# Altium PCB PCB1.PcbDoc
Units mm, origin at the board's own origin, x right, y up, seen from the top; angles counter-clockwise.
Board outline 58 x 80 mm, 2 copper layers (Top Layer, Bottom Layer); 39 components, 48 nets, 181 pads, 24 vias.
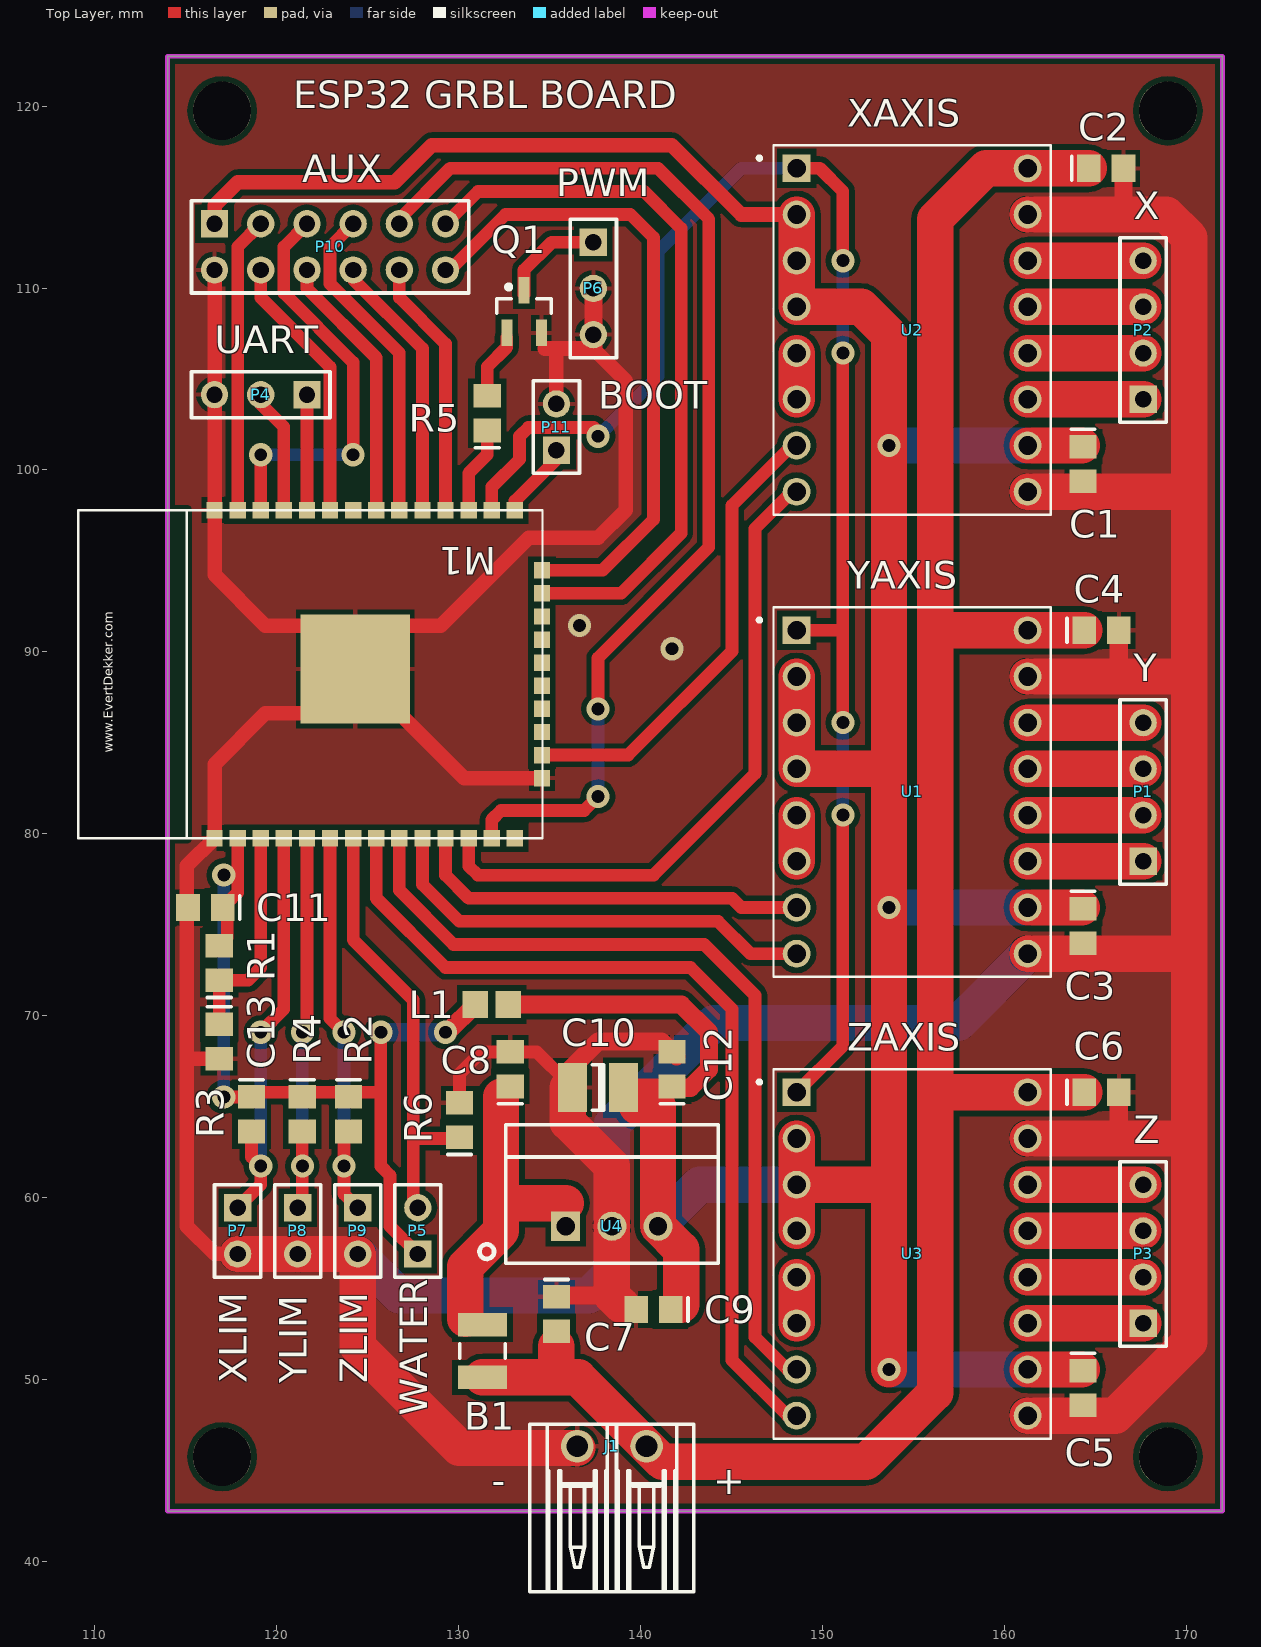
[diagram p0: Top Layer view]
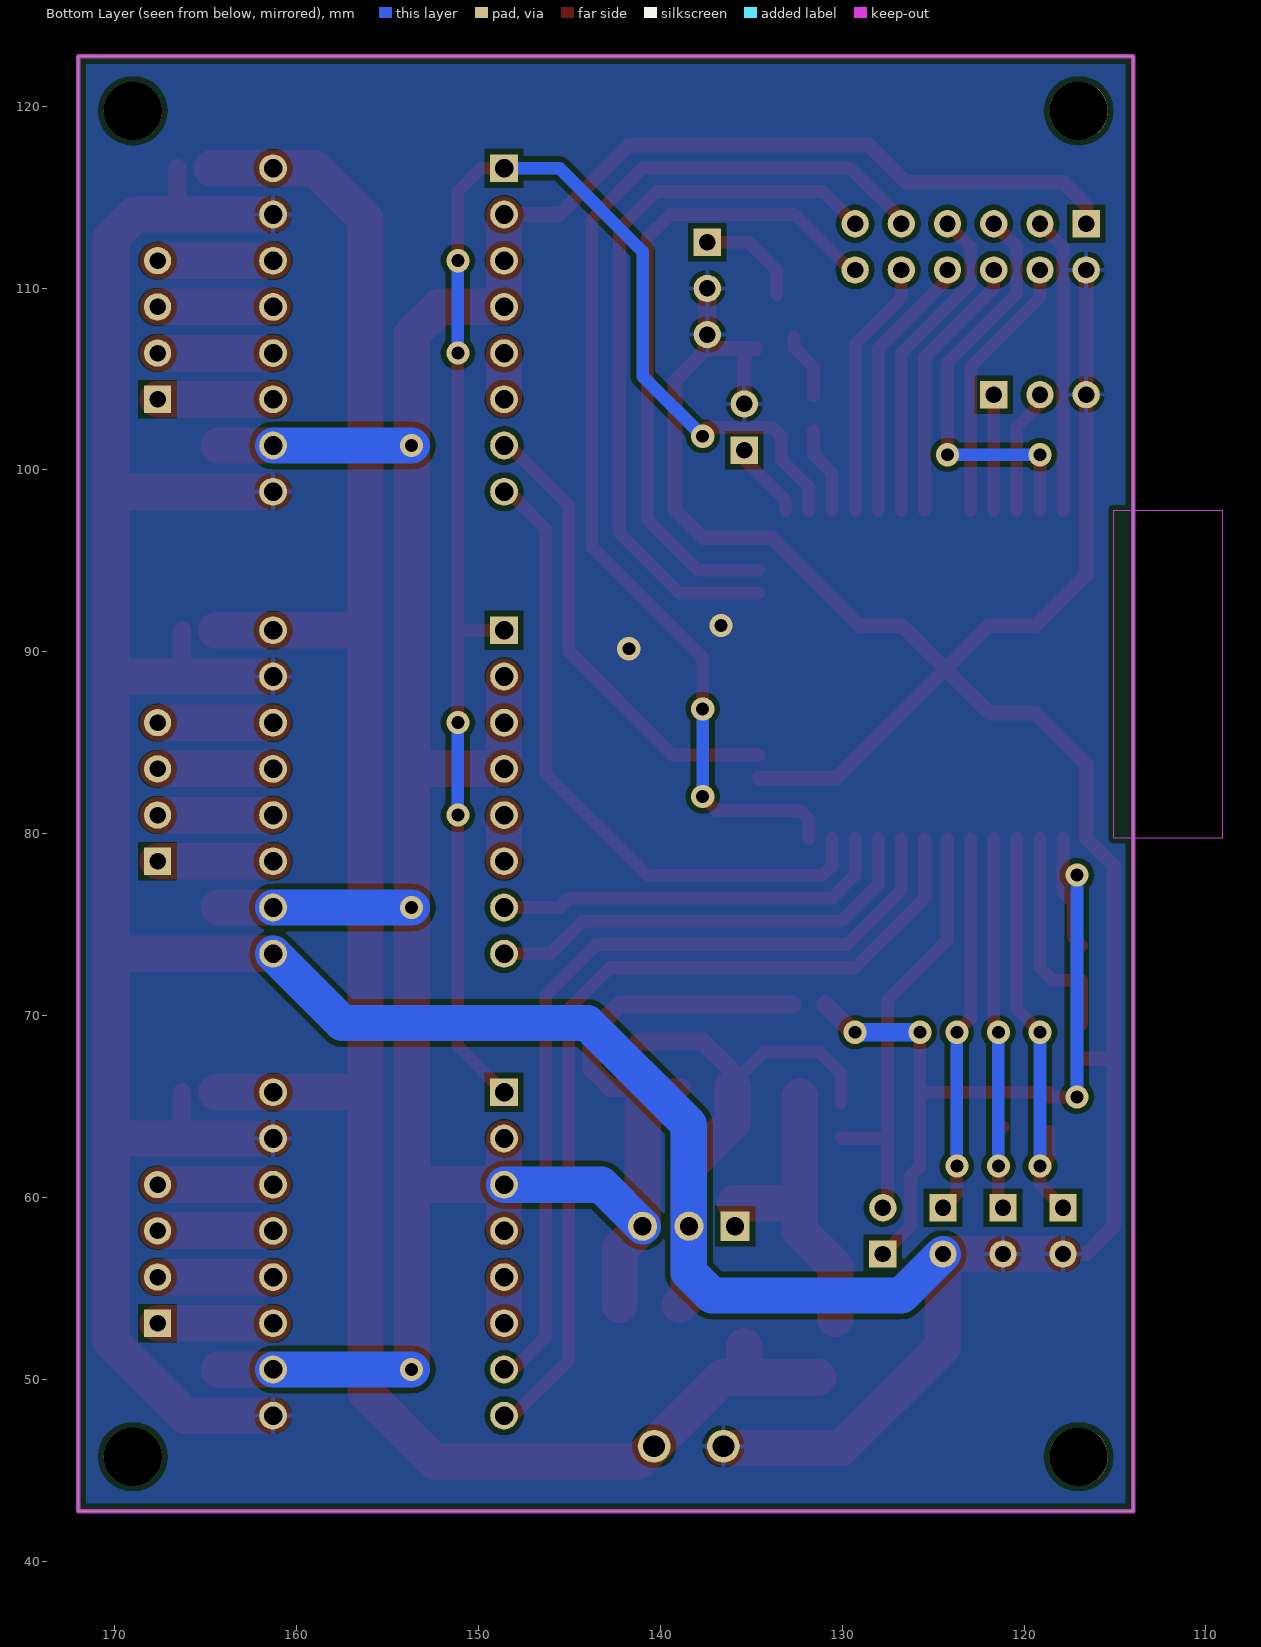
[diagram p1: Bottom Layer view, seen from below]

## Layer stack, top to bottom
Top Solder: solder mask 0.0102, Solder Resist, Dk 3.5
Top Layer: signal copper 0.0356
Dielectric 1: dielectric 0.32, FR-4, Dk 4.8
Bottom Layer: signal copper 0.0356
Bottom Solder: solder mask 0.0102, Solder Resist, Dk 3.5

## Board outline
114,42.746 172,42.746 172,122.746 114,122.746

## Design rules (kind name [scope] priority, off if disabled: settings)
Clearance Clearance_1 [All vs InPolygon] p1: gap=0.3
Clearance [All] p2: gap=0.15
Height [All] p1: minheight=0 maxheight=50 prefheight=12.7
HoleSize [All] p1: absolutevalues=TRUE maxlimit=4.2 minlimit=0.025 maxpercent=80.000 minpercent=20.000
PolygonConnect [ispad] p1: connectstyle=Relief reliefconductorwidth=0.254 reliefentries=4 polygonreliefangle="90 Angle" airgapwidth=0.254
PolygonConnect PolygonConnect_1 [All] p2: connectstyle=Direct reliefconductorwidth=0.254 reliefentries=4 polygonreliefangle="90 Angle" airgapwidth=0.254
RoutingVias [All] p1: holewidth=0.3 width=0.6 viastyle="Through Hole" minholewidth=0.2 minwidth=0.5 maxholewidth=3.81 maxwidth=5.08
SilkToSolderMaskClearance SilkscreenOverComponentPads [IsPad] p1: minsilkscreentomaskgap=0.254 clearancetoexposedcopper=TRUE
SolderMaskExpansion [All] p1: expansion=0.102
UnpouredPolygon [All] p1: allowunpoured=FALSE
Width [All] p1: maxlimit=10 minlimit=0.15 preferedwidth=0.3 minimp=50.000000 maximp=50.000000 favimp=50.000000
26 further rules are at their usual default settings.

## Components (designator, comment, footprint, x,y, rotation, side; value= is the part's Value field where it differs from the comment)
B1 "Ferrite" INDC3225N 131.318,51.562 r270 top
C1 "Cap Semi" 0805 164.338,100.33 r270 top
C2 "Cap Semi" 0805 165.608,116.586 r0 top
C3 "Cap Semi" 0805 164.338,74.93 r270 top
C4 "Cap Semi" 0805 165.354,91.186 r0 top
C5 "Cap Semi" 0805 164.338,49.53 r270 top
C6 "Cap Semi" 0805 165.354,65.786 r0 top
C7 "Cap Semi" 0805 135.382,53.594 r270 top
C8 "Cap Semi" 0805 132.842,67.056 r90 top
C9 "Cap Semi" 0805 140.716,53.848 r180 top
C10 "Cap Semi" 1210 137.668,66.04 r180 top
C11 "Cap Semi" 0805 116.078,75.946 r180 top
C12 "Cap Semi" 0805 141.732,67.056 r90 top
C13 "Cap Semi" 0805 116.84,68.58 r270 top
J1 "1037490000" SC_3_81_270G_02 138.43,42.926 r0 top
L1 "Ferrite" INDC2012N 131.826,70.612 r0 top
M1 "ESP32S_Module" ESP32S 134.62,79.756 r90 top
P1 "Y" HDR1X4 167.64,78.486 r90 top
P2 "X" HDR1X4 167.64,103.886 r90 top
P3 "Z" HDR1X4 167.64,53.086 r90 top
P4 "UART" HDR1X3 121.666,104.14 r180 top
P5 "WATER" HDR1X2 127.762,56.896 r90 top
P6 "PWM" HDR1X3 137.414,112.522 r270 top
P7 "XLIM" HDR1X2 117.856,59.436 r270 top
P8 "YLIM" HDR1X2 121.158,59.436 r270 top
P9 "ZLIM" HDR1X2 124.46,59.436 r270 top
P10 "AUX" HDR2X6 116.586,113.538 r0 top
P11 "BOOT" HDR1X2 135.382,101.092 r90 top
Q1 "BSS123A" SOT23_M 133.604,108.712 r90 top
R1 "Res2" 0805 116.84,72.898 r90 top
R2 "Res2" 0805 123.952,64.582 r270 top
R3 "Res2" 0805 118.618,64.582 r270 top
R4 "Res2" 0805 121.412,64.582 r270 top
R5 "Res2" 0805 131.572,103.124 r90 top
R6 "Res2" 0805 130.048,64.262 r90 top
U1 "YAXIS" MODULE_A4988_STEPPER_MOTOR_DRIVER_CARRIER 154.94,82.296 r0 top
U2 "XAXIS" MODULE_A4988_STEPPER_MOTOR_DRIVER_CARRIER 154.94,107.696 r0 top
U3 "ZAXIS" MODULE_A4988_STEPPER_MOTOR_DRIVER_CARRIER 154.94,56.896 r0 top
U4 "3V3REG" TRS1-24xx 138.43,58.42 r0 top

## Footprints (in the part's own frame and the unit in brackets; to place one, negate y for a bottom-side part, rotate by r counter-clockwise, add the part's x,y. Pads: shape width x height; smd on the part's side, far side on the other; paste and mask are expansions set on the pad)
0805 [mm] "Chip Capacitor; Body 2.0 x 1.2 mm (LxW typ)"
  rect 1.3x1.5 smd: 1(-0.95,0) 2(0.95,0)
  silkscreen extent -1.9,-0.65 -1.9,0.65
1210 [mm] "Chip Capacitor; Body 3.2 x 2.5 mm (LxW typ)"
  rect 1.6x2.7 smd: 1(-1.4,0) 2(1.4,0)
  silkscreen extent -0.3,-1.25 0.3,1.25, body extent -1.37,-1.3 1.42,1.32, height 2.5
ESP32S [mm] "ESP32S-Module"
  rect 0.9x0.9 smd: 1(0,18.034) 2(0,16.764) 3(0,15.494) 4(0,14.224) 5(0,12.954) 6(0,11.684) 7(0,10.414) 8(0,9.144) 9(0,7.874) 10(0,6.604) 11(0,5.334) 12(0,4.064) 13(0,2.794) 14(0,1.524) 15(3.3,0.034) 16(4.57,0.034) 17(5.84,0.034) 18(7.11,0.034) 19(8.38,0.034) 20(9.65,0.034) 21(10.92,0.034) 22(12.19,0.034) 23(13.46,0.034) 24(14.73,0.034) 25(18.034,1.524) 26(18.034,2.794) 27(18.034,4.064) 28(18.034,5.334) 29(18.034,6.604) 30(18.034,7.874) 31(18.034,9.144) 32(18.034,10.414) 33(18.034,11.684) 34(18.034,12.954) 35(18.034,14.224) 36(18.034,15.494) 37(18.034,16.764) 38(18.034,18.034)
  rect 6x6 smd: 101(9.3,10.3)
  Keep-Out Layer region: 0,19.558 18.034,19.558 18.034,25.527 0,25.527
  silkscreen extent 0,0 18.03,25.53, body extent 0,0 18.03,25.53, height 2
HDR1X2 [mm] "Connector; Header; 2 Position"
  rect 1.5x1.5 hole 0.9: 1(0,0)
  round 1.5 hole 0.9: 2(2.54,0)
  silkscreen extent -1.27,-1.27 3.81,1.27
HDR1X3 [mm] "Connector; Header; 3 Position"
  rect 1.5x1.5 hole 0.9: 1(0,0)
  round 1.5 hole 0.9: 2(2.54,0) 3(5.08,0)
  silkscreen extent -1.27,-1.27 6.35,1.27
HDR1X4 [mm] "Connector; Header; 4 Position"
  rect 1.5x1.5 hole 0.9: 1(0,0)
  round 1.5 hole 0.9: 2(2.54,0) 3(5.08,0) 4(7.62,0)
  silkscreen extent -1.27,-1.27 8.89,1.27
HDR2X6 [mm] "Connector; Header; 6x2 Position"
  rect 1.5x1.5 hole 0.9: 1(0,0)
  round 1.5 hole 0.9: 2(0,-2.54) 3(2.54,0) 4(2.54,-2.54) 5(5.08,0) 6(5.08,-2.54) 7(7.62,0) 8(7.62,-2.54) 9(10.16,0) 10(10.16,-2.54) 11(12.7,0) 12(12.7,-2.54)
  silkscreen extent -1.27,-3.81 13.97,1.27
INDC2012N [mm] "Chip Inductor, Body 2.0x1.2mm, IPC Medium Density"
  rect 1.4x1.5 smd: 1(0.9,0) 2(-0.9,0)
  body extent -1.1,-0.7 1.1,0.7, height 1.1
INDC3225N [mm] "Chip Inductor, Body 3.2x2.5mm, IPC Medium Density"
  rect 1.3x2.7 smd: 1(1.45,0) 2(-1.45,0)
  silkscreen extent -0.4,-1.25 0.4,1.25, body extent -1.35,-1.7 1.35,1.7, height 1.5
MODULE_A4988_STEPPER_MOTOR_DRIVER_CARRIER [mm]
  rect 1.53x1.53 hole 1.02: 1(-6.35,8.89)
  round 1.53 hole 1.02: 2(-6.35,6.35) 3(-6.35,3.81) 4(-6.35,1.27) 5(-6.35,-1.27) 6(-6.35,-3.81) 7(-6.35,-6.35) 8(-6.35,-8.89) 9(6.35,-8.89) 10(6.35,-6.35) 11(6.35,-3.81) 12(6.35,-1.27) 13(6.35,1.27) 14(6.35,3.81) 15(6.35,6.35) 16(6.35,8.89)
  silkscreen extent -8.5,-10.16 7.62,10.16
SC_3_81_270G_02 [mm] "OMNIMATE Signal - Serie BC/SC 3.81  SC 3.81/02/270G 3.2"
  round 1.8 hole 1.2: A1(1.91,3.4) A2(-1.9,3.4)
  silkscreen extent -4.51,-4.6 4.5,4.6, body extent -4.51,-4.6 4.5,4.6, height 7.1
SOT23_M [mm] "SOT23, 3-Leads, Body 2.9x1.3mm, Pitch 0.95mm, Lead Span 2.3mm - Reverse Pinning, IPC Low Density"
  rect 1.45x0.6 smd: 1(1.175,0) 2(-1.175,-0.95) 3(-1.175,0.95)
  silkscreen extent -0.1,-1.5 1.47,1.5, body extent -0.7,-1.5 0.7,1.5, height 1.1
TRS1-24xx [mm] "Switching Regulator,18-32Vin,5Vout 1A"
  rect 1.6x1.6 hole 1: 1(-2.54,0)
  round 1.6 hole 1: 2(0,0) 3(2.54,0)
  silkscreen extent -7.28,-2.03 5.84,5.59, body extent -5.84,-2.03 5.84,5.59, height 10.2

## Part data
B1: library part Inductor, "Inductor"
C1 C2 C3 C4 C5 C6 C7 C8 C9 C10 C11 C12 C13: "Capacitor (Semiconductor SIM Model)"
J1: "OMNIMATE Signal - series BC/SC 3.81"
L1: library part "Inductor Iron", "Magnetic-Core Inductor"
M1: "Esp-32S"
P1 P2 P3: library part "Header 4", "Header, 4-Pin"
P4 P6: library part "Header 3", "Header, 3-Pin"
P5 P7 P8 P9 P11: library part "Header 2", "Header, 2-Pin"
P10: library part "Header 6X2", "Header, 6-Pin, Dual row"
Q1: "N-Channel Enhancement Mode Vertical DMOS FET"
R1 R2 R3 R4 R5 R6: "Resistor"
U1 U2 U3: library part A4988_STEPPER_MOTOR_DRIVER_CARRIER, "Stepper Motor Driver"
U4: library part TSR1-2433, "Switching Regulator,18-32Vin,3.3Vout 1A"

## Free pads (board coordinates)
  round 3.2 hole 3.2: 0(169,45.746) 1(117,45.746) 2(117,119.746) 3(169,119.746)

## Via types
v1: diameter 1.27, hole 0.711, Top Layer to Bottom Layer, tented both sides, 24 vias

## Nets (pads, with @x,y where several pads share a name; then routed paths per layer and width w, separated by ;. In a path a pad name is that pad's centre, name@x,y a point inside that pad or via, vN(x,y) a via of type N, cw(c..) or ccw(c..) an arc to the next point about the centre after c; other vN are vias at no path point)
BOOT: M1.25 P11.1 | length 4.2
  Top Layer w0.7: M1.25 133.096,98.298 135.382,100.584 P11.1
GND: C1.2 C2.2 C3.2 C4.2 C5.2 C6.2 C7.1 C8.2 C9.2 C10.2 C11.2 C12.2 C13.2 J1.A2 M1.1 M1.15 M1.38 M1.101 P4.3 P6.2 P6.3 P7.2 P8.2 P9.2 P10.2 P11.2 Q1.2 R6.2 U1.9 U1.15 U2.9 U2.15 U3.9 U3.15 U4.2 | length 350.9
  Top Layer w0.7: R6.2 130.048,66.802 131.252,68.006 C8.2 134.302,68.006 136.014,66.294 C10.2
  Top Layer w0.8: 115.25,67.63 C13.2 ; P10.2@116.332,110.998 P10.2 P4.3 M1.38 116.586,94.234 119.38,91.44 121.936,91.44 M1.101 ; P7.2 116.586,56.896 115.062,58.42 115.062,78.232 M1.1 116.586,83.82 119.38,86.614 121.878,86.614 M1.101 ; M1.15 130.32,83.056 M1.101 ; 134.742,106.68 135.382,106.68 ; P11.2 135.382,106.68 ; M1.101 126.704,91.44 129.032,91.44 133.858,96.266 137.668,96.266 139.192,97.79 139.192,104.902 137.414,106.68 135.382,106.68
  Top Layer w1: C7.1@135.382,54.61 138.43,54.61 ; C10.2@136.014,66.04 136.014,66.294 136.014,66.926 137.668,68.58 141.158,68.58 C12.2 C12.2@141.986,67.752 ; 137.414,106.68 P6.3 P6.2 ; 166.304,63.312 C6.2 ; 166.304,88.712 C4.2 ; 166.558,114.234 C2.2
  Top Layer w2: P7.2 P8.2 P9.2 124.46,51.816 130.048,46.228 J1.A2@136.53,46.228 ; C10.2@136.014,66.04 136.014,64.138 138.43,61.722 U4.2 138.43,54.61 138.938,54.102 ; U3.9 166.116,48.006 170.18,52.07 170.18,63.246 ; U3.15 170.18,63.246 ; U1.9 170.18,73.406 ; U1.15 170.18,88.646 ; U2.9 170.18,98.806 ; U2.15 168.91,114.046 170.18,112.776 170.18,98.806 ; 170.18,63.246 170.18,73.406 ; 170.18,73.406 170.18,88.646 ; 170.18,88.646 170.18,98.806
  Bottom Layer w2: P9.2 126.746,54.61 137.16,54.61 138.43,55.88 U4.2 138.43,64.008 144.018,69.596 157.48,69.596 U1.9
  other v1: 141.732,90.17 136.652,91.44
GPIO2: M1.24 P10.12 | length 36
  Top Layer w0.7: P10.12 129.54,110.998 132.588,114.046 139.446,114.046 140.716,112.776 140.716,97.282 137.92,94.486 M1.24
GPIO14: M1.13 P10.9 | length 61.2
  Top Layer w0.7: P10.9 126.746,113.792 129.54,116.586 140.97,116.586 143.764,113.792 143.764,95.758 137.668,89.662 v1(137.668,86.868) ; M1.13 131.826,80.772 132.334,81.28 136.906,81.28 v1(137.668,82.042)
  Bottom Layer w0.7: v1(137.668,82.042) v1(137.668,86.868)
GPIO15: M1.23 P10.11 | length 40.3
  Top Layer w0.7: P10.11 131.064,115.316 140.208,115.316 142.24,113.284 142.24,96.52 138.936,93.216 M1.23
GPIO17: M1.28 P10.10 | length 14.3
  Top Layer w0.7: P10.10 126.746,109.474 129.286,106.934 M1.28
I2C_SCL: M1.36 P10.5 | length 22.9
  Top Layer w0.7: M1.36 v1(119.126,100.838) ; P10.5 120.396,112.268 120.396,109.728 124.206,105.918 v1(124.206,100.838)
  Bottom Layer w0.7: v1(119.126,100.838) v1(124.206,100.838)
I2C_SDA: M1.33 P10.4 | length 14.8
  Top Layer w0.7: P10.4 119.126,109.474 122.936,105.664 M1.33
MOT_EN: M1.26 U1.1 U2.1 U3.1 | length 86.9
  Top Layer w0.7: M1.26 131.826,99.06 133.35,100.584 133.35,101.854 133.838,102.342 137.434,102.342 v1@137.922,101.854 ; U3.1 151.13,68.326 v1(151.13,81.026) ; U1.1 151.13,91.186 ; U2.1 149.86,116.586 151.13,115.316 v1(151.13,111.506) ; v1(151.13,86.106) 151.13,91.186 ; v1(151.13,106.426) 151.13,91.186
  Bottom Layer w0.7: v1(137.668,101.854) 140.97,105.156 140.97,112.014 145.542,116.586 U2.1 ; v1(151.13,81.026) v1(151.13,86.106) ; v1(151.13,106.426) v1(151.13,111.506)
NetB1_2: B1.2 C8.1 U4.1 | length 16.6
  Top Layer w2: B1.2@130.376,53.34 130.376,56.208 132.334,58.166 132.334,59.69 ; C8.1@132.334,65.532 132.334,59.69 ; 135.89,59.69 132.334,59.69
NetC13_1: C13.1 M1.3 R1.1 | length 12.1
  Top Layer w0.7: C13.1 R1.1 118.43,71.948 119.126,72.644 M1.3
NetM1_7: M1.7 P5.2 R6.1 | length 24.4
  Top Layer w0.7: M1.7 124.206,74.168 127.508,70.866 127.508,63.246 ; P5.2 127.508,59.69 127.508,63.246 ; R6.1 129.982,63.246 127.508,63.246
NetM1_34: M1.34 P4.1 | length 6.3
  Top Layer w0.7: M1.34 P4.1
NetM1_35: M1.35 P4.2 | length 6.9
  Top Layer w0.7: P4.2 119.126,103.632 120.396,102.362 M1.35
NetP1_1: P1.1 U1.11 | length 6.3
  Top Layer w2: U1.11 P1.1
NetP1_2: P1.2 U1.12 | length 6.3
  Top Layer w2: U1.12 P1.2
NetP1_3: P1.3 U1.13 | length 6.3
  Top Layer w2: U1.13 P1.3
NetP1_4: P1.4 U1.14 | length 6.3
  Top Layer w2: U1.14 P1.4
NetP2_1: P2.1 U2.11 | length 6.3
  Top Layer w2: U2.11 P2.1
NetP2_2: P2.2 U2.12 | length 6.3
  Top Layer w2: U2.12 P2.2
NetP2_3: P2.3 U2.13 | length 6.3
  Top Layer w2: U2.13 P2.3
NetP2_4: P2.4 U2.14 | length 6.3
  Top Layer w2: U2.14 P2.4
NetP3_1: P3.1 U3.11 | length 6.3
  Top Layer w2: U3.11 P3.1
NetP3_2: P3.2 U3.12 | length 6.3
  Top Layer w2: U3.12 P3.2
NetP3_3: P3.3 U3.13 | length 6.3
  Top Layer w2: U3.13 P3.3
NetP3_4: P3.4 U3.14 | length 6.3
  Top Layer w2: U3.14 P3.4
NetP6_1: P6.1 Q1.1 | length 5.8
  Top Layer w0.7: Q1.1@133.604,109.633 133.604,110.998 135.128,112.522 P6.1
NetQ1_3: Q1.3 R5.2 | length 3.7
  Top Layer w0.7: R5.2 131.572,105.664 132.654,106.746 Q1.3@132.654,107.283
NetU1_5: U1.5 U1.6 | length 2.5
  Top Layer w2: U1.6 U1.5
NetU2_5: U2.5 U2.6 | length 2.5
  Top Layer w2: U2.6 U2.5
NetU3_5: U3.5 U3.6 | length 2.5
  Top Layer w2: U3.6 U3.5
PWM_LASER: M1.27 R5.1 | length 4.8
  Top Layer w0.7: M1.27 130.556,99.822 131.572,100.838 R5.1
SD_CLK: M1.30 P10.7 | length 17.9
  Top Layer w0.7: P10.7 122.936,112.268 122.936,110.236 126.746,106.426 M1.30
SD_MISO: M1.31 P10.6 | length 14.8
  Top Layer w0.7: P10.6 121.666,109.982 125.476,106.172 M1.31
SD_MOSI: M1.37 P10.3 | length 16.3
  Top Layer w0.7: M1.37 117.856,112.268 P10.3
SD_SS: M1.29 P10.8 | length 14.8
  Top Layer w0.7: P10.8 124.206,110.49 128.016,106.68 M1.29
VCC: C1.1 C3.1 C5.1 C9.1 C10.1 C12.1 L1.1 P10.1 U1.2 U1.3 U1.4 U1.10 U2.2 U2.3 U2.4 U2.10 U3.2 U3.3 U3.4 U3.10 U4.3 | length 195.9
  Top Layer w0.8: P10.1 116.586,114.554 117.856,115.824 126.492,115.824 128.524,117.856 141.732,117.856 145.542,114.046 U2.2
  Top Layer w1: L1.1 142.24,70.612 143.764,69.088 143.764,67.056 142.748,66.04 C10.1 ; C10.1@138.814,66.04 C10.1@138.952,65.902
  Top Layer w2: C10.1@139.83,65.024 140.97,65.024 U4.3 142.24,57.15 C9.1@142.24,54.102 ; U3.4 U3.3 ; U3.2 U3.3 ; U1.2 U1.3 U1.4 153.67,83.566 ; U2.2 U2.3 U2.4 152.146,108.966 153.67,107.442 v1(153.67,101.346) 153.67,83.566 ; v1(153.67,50.546) 153.67,60.706 ; U3.10 C5.1@164.272,50.546 ; U1.10 C3.1@164.272,75.946 ; U2.10 C1.1@164.272,101.346 ; U3.3 153.67,60.706 ; 153.67,60.706 v1(153.67,75.946) 153.67,83.566
  Bottom Layer w2: U4.3 143.256,60.706 U3.3 ; v1(153.67,50.546) U3.10 ; v1(153.67,75.946) U1.10 ; v1(153.67,101.346) U2.10
VCC_ESP: C11.1 L1.2 M1.2 P5.1 R1.2 R2.1 R3.1 R4.1 | length 47.3
  Top Layer w0.7: v1@116.84,65.532 v1(117.094,65.532) R3.1 ; R1.2 117.282,74.29 117.282,76.2 117.856,76.774 117.856,77.724 ; v1@116.84,77.724 v1(117.094,77.724) 117.856,77.724 ; M1.2 117.856,77.724 ; R3.1@118.618,65.786 125.73,65.786 ; v1(125.73,69.088) 125.73,65.786 ; P5.1 126.238,58.42 126.238,61.214 125.73,61.722 125.73,65.786
  Top Layer w1: v1(129.286,69.088) 129.402,69.088 L1.2
  Bottom Layer w0.7: v1(117.094,65.532) v1(117.094,77.724)
  Bottom Layer w1: v1(125.73,69.088) v1(129.286,69.088)
VMOT: B1.1 C2.1 C4.1 C6.1 C7.2 J1.A1 U1.16 U2.16 U3.16 | length 120.6
  Top Layer w2: B1.1 136.578,50.112 141.224,45.466 152.4,45.466 156.21,49.276 156.21,65.786 ; 135.382,50.112 135.382,51.816 ; C6.1 U3.16 156.21,65.786 ; C4.1 U1.16 156.21,91.186 ; C2.1 U2.16 159.004,116.586 156.21,113.792 156.21,91.186 ; 156.21,65.786 156.21,91.186
XDIR: M1.12 U2.8 | length 36.4
  Top Layer w0.7: M1.12 130.556,78.232 131.064,77.724 140.716,77.724 146.304,83.312 146.304,96.774 148.336,98.806 U2.8
XLIM: M1.4 P7.1 R3.2 | length 23.5
  Top Layer w0.7: P7.1 119.126,60.706 v1(119.126,61.722) 118.618,62.23 R3.2 ; v1(119.126,69.088) 120.396,70.358 M1.4
  Bottom Layer w0.7: v1(119.126,61.722) v1(119.126,69.088)
XSTEP: M1.16 U2.7 | length 25.7
  Top Layer w0.7: M1.16 139.326,84.326 145.034,90.034 145.034,98.044 148.336,101.346 U2.7
YDIR: M1.10 U1.8 | length 25.1
  Top Layer w0.7: M1.10 128.016,77.216 130.048,75.184 144.272,75.184 146.05,73.406 U1.8@148.336,73.406 ; U1.8 U1.8@148.336,73.406 ; U1.8@148.59,73.66 U1.8@148.336,73.406
YLIM: M1.5 P8.1 R4.2 | length 22.9
  Top Layer w0.7: P8.1 121.412,59.69 v1(121.412,61.722) R4.2 R4.2@121.158,63.886 ; v1@121.158,69.088 121.666,69.596 M1.5
  Bottom Layer w0.7: v1(121.412,61.722) v1(121.412,69.088)
YSTEP: M1.11 U1.7 | length 22.1
  Top Layer w0.7: M1.11 129.286,77.724 130.556,76.454 145.034,76.454 145.542,75.946 U1.7
ZDIR: M1.8 U3.8 | length 49.5
  Top Layer w0.7: M1.8 125.476,76.454 129.286,72.644 142.748,72.644 145.034,70.358 145.034,51.054 148.082,48.006 U3.8
ZLIM: M1.6 P9.1 R2.2 | length 23.1
  Top Layer w0.7: M1.6 122.936,69.85 v1(123.698,69.088) ; R2.2@123.698,63.886 v1(123.698,61.722) 123.698,60.198 P9.1
  Bottom Layer w0.7: v1(123.698,61.722) v1(123.698,69.088)
ZSTEP: M1.9 U3.7 | length 46.6
  Top Layer w0.7: M1.9 126.746,76.894 129.726,73.914 143.51,73.914 146.304,71.12 146.304,52.324 148.082,50.546 U3.7
pads on no net: M1.14 M1.17 M1.18 M1.19 M1.20 M1.21 M1.22 M1.32

## Polygon pours and split planes (outlines as drawn)
GND on Bottom Layer "Top Overlay-No Net" (solid, remove dead copper, pour order 3): 113.03,124.206 172.466,124.206 173.736,122.936 173.736,42.164 172.212,40.64 113.792,40.64 111.76,42.672 111.506,42.926 111.506,122.174
GND on Top Layer "Top Overlay-No Net" (solid, remove dead copper, pour order 5): 113.03,124.46 172.72,124.46 174.244,122.936 174.244,42.418 172.212,40.386 114.3,40.386 111.76,42.926 110.998,43.688 110.998,122.174

## Keep-outs
Keep-Out Layer:
  the board outline again, w0.254

## Silkscreen, mask and mechanical layers (free items; w line width, h text height)
Top Overlay:
  text "ESP32 GRBL BOARD" at 120.904,119.888 h1.52
  text "-" at 131.826,43.688 h1.52
  text "+" at 144.018,43.688 h1.52

## Text inside footprints (layer, text, board x,y; h text height)
M1: Top Overlay "www.EvertDekker.com" at 110.998,84.455 h0.5 r90